# Altium PCB V1.PcbDoc
Units mm, origin at the board's own origin, x right, y up, seen from the top; angles counter-clockwise.
Board outline 48 x 33 mm, 4 copper layers (Top Layer, GND, PWR, Bottom Layer), stack 0.778 mm thick; 46 components, 45 nets, 226 pads, 36 vias.
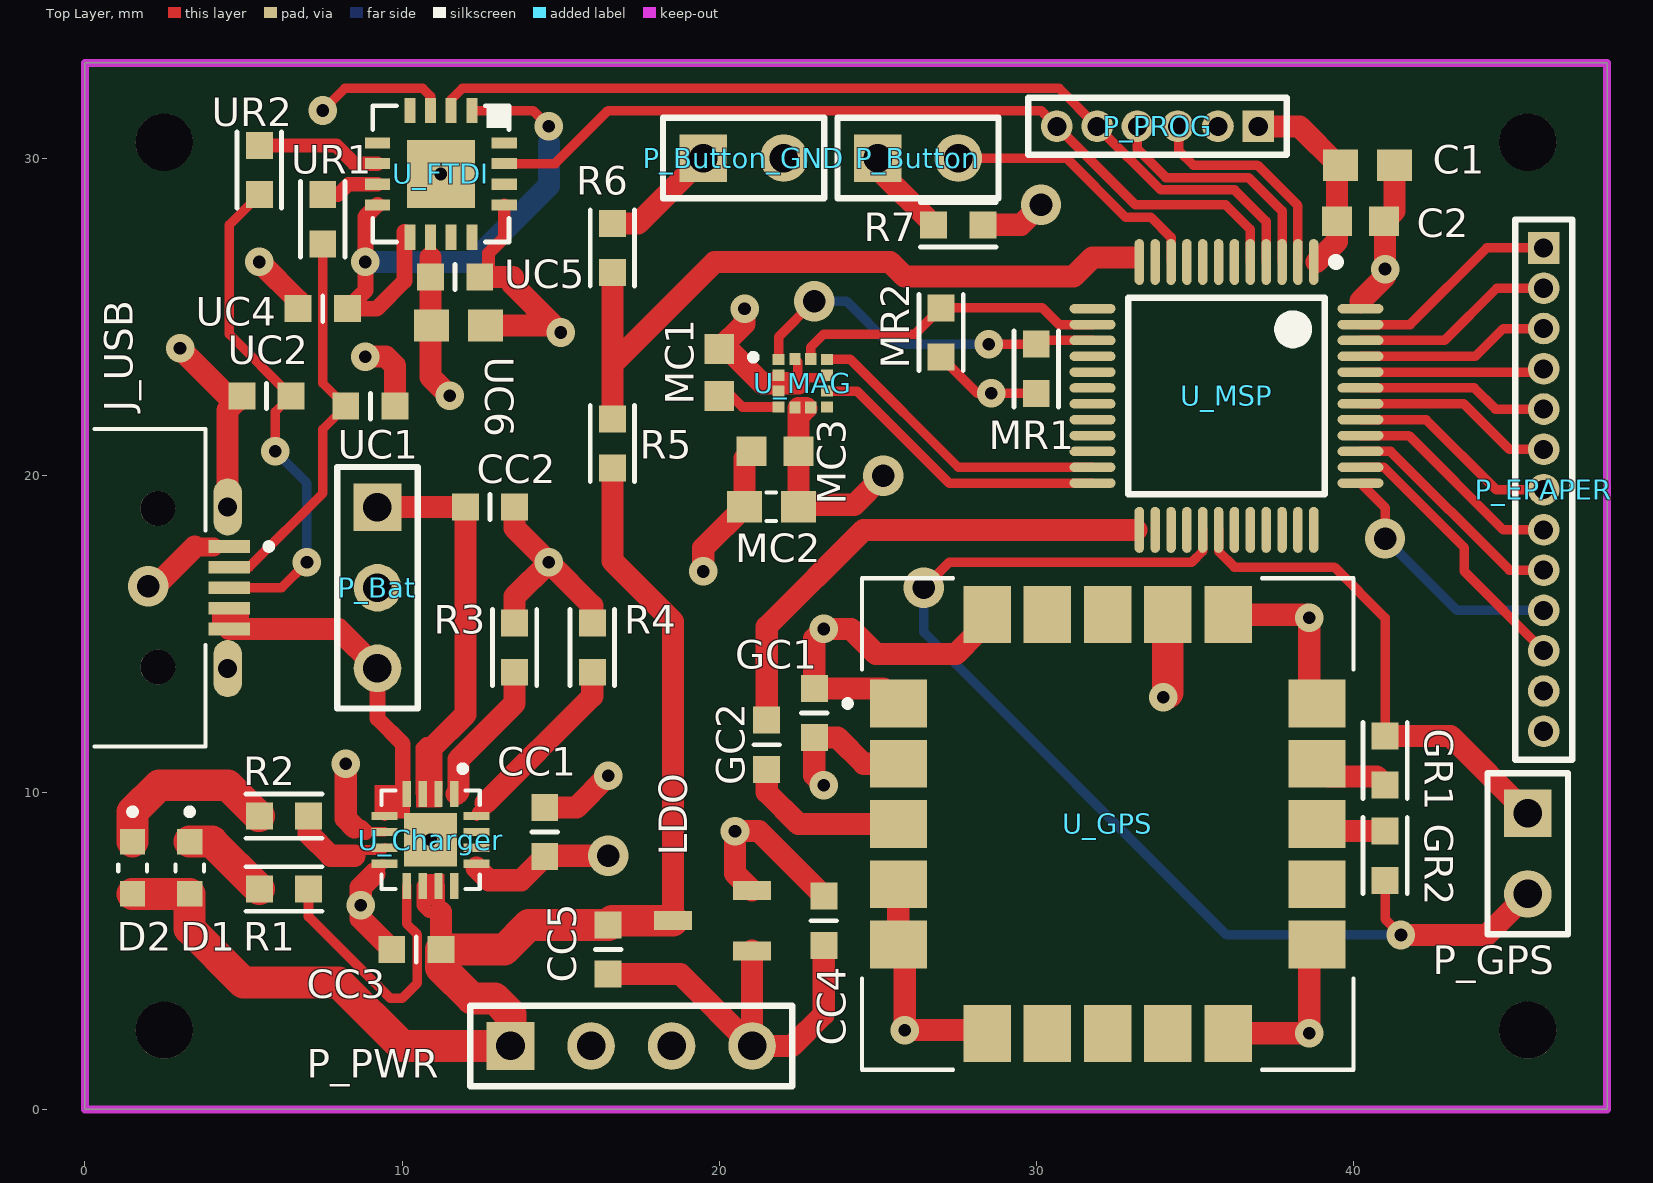
[diagram p0: Top Layer view]
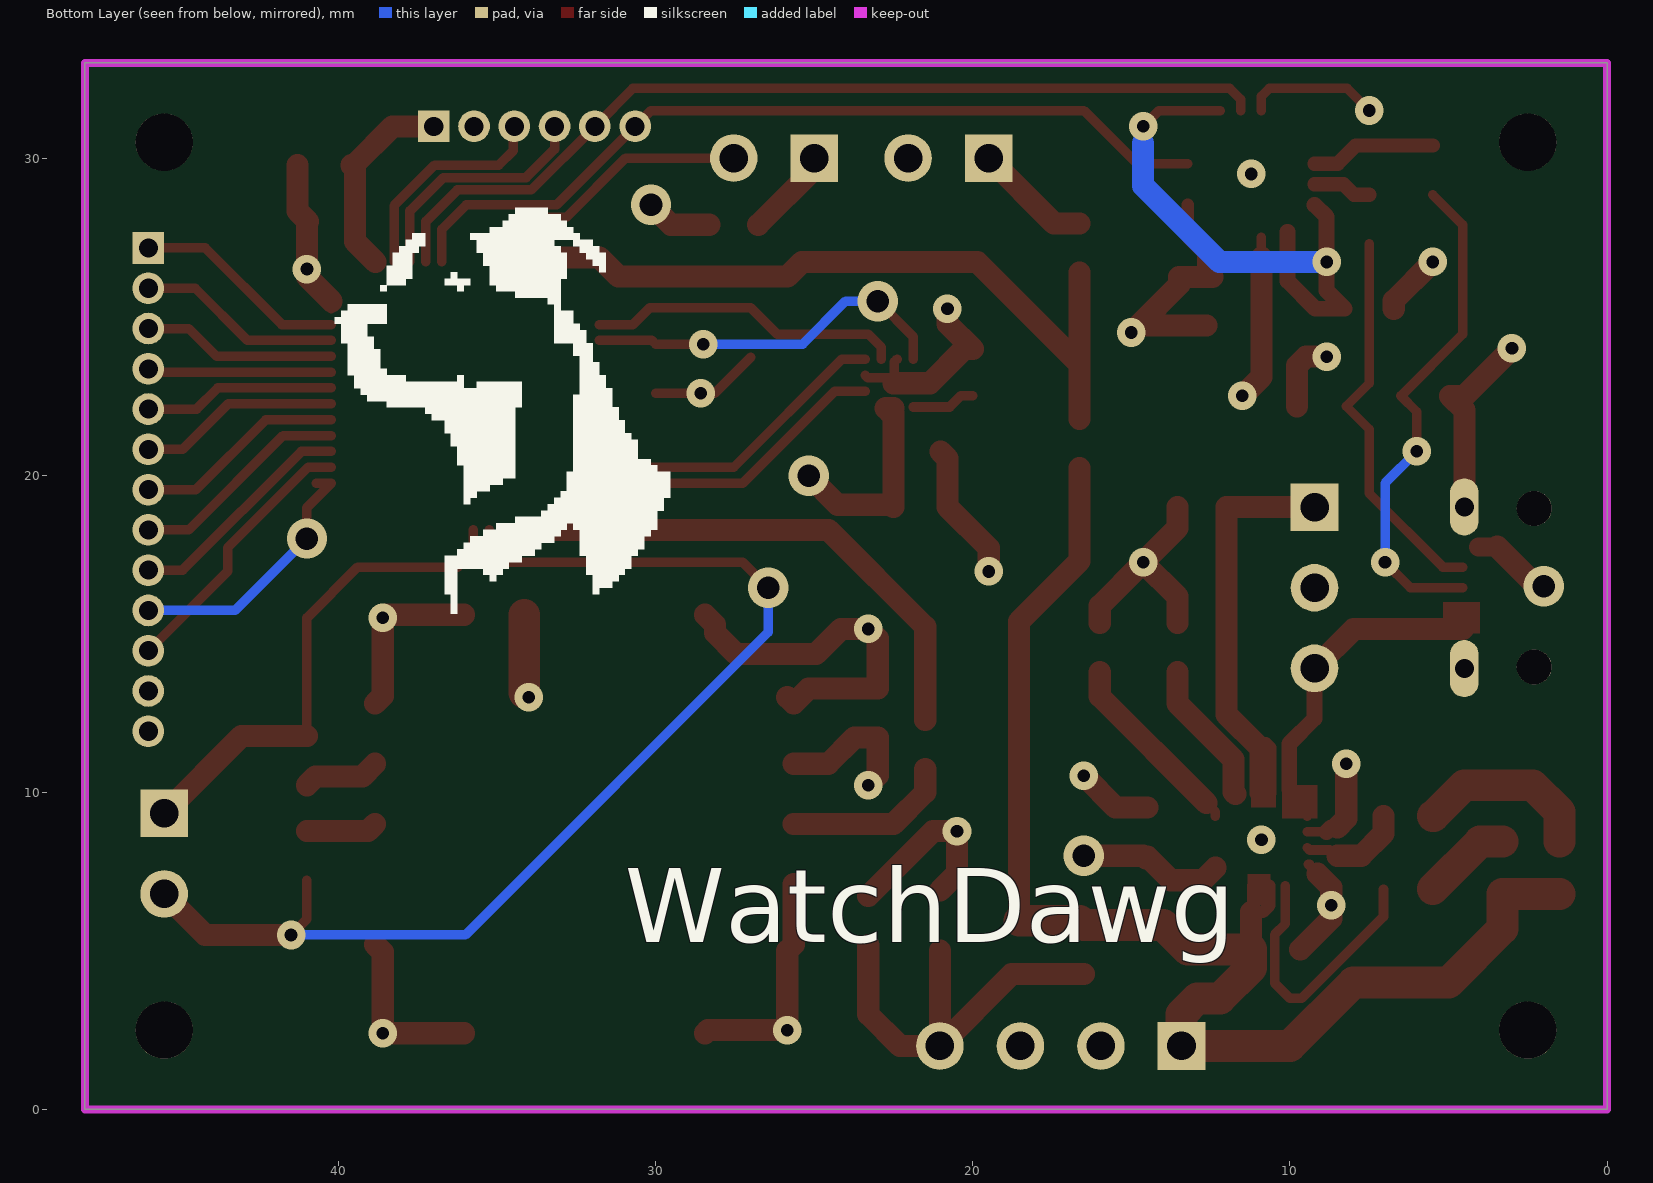
[diagram p1: Bottom Layer view, seen from below]
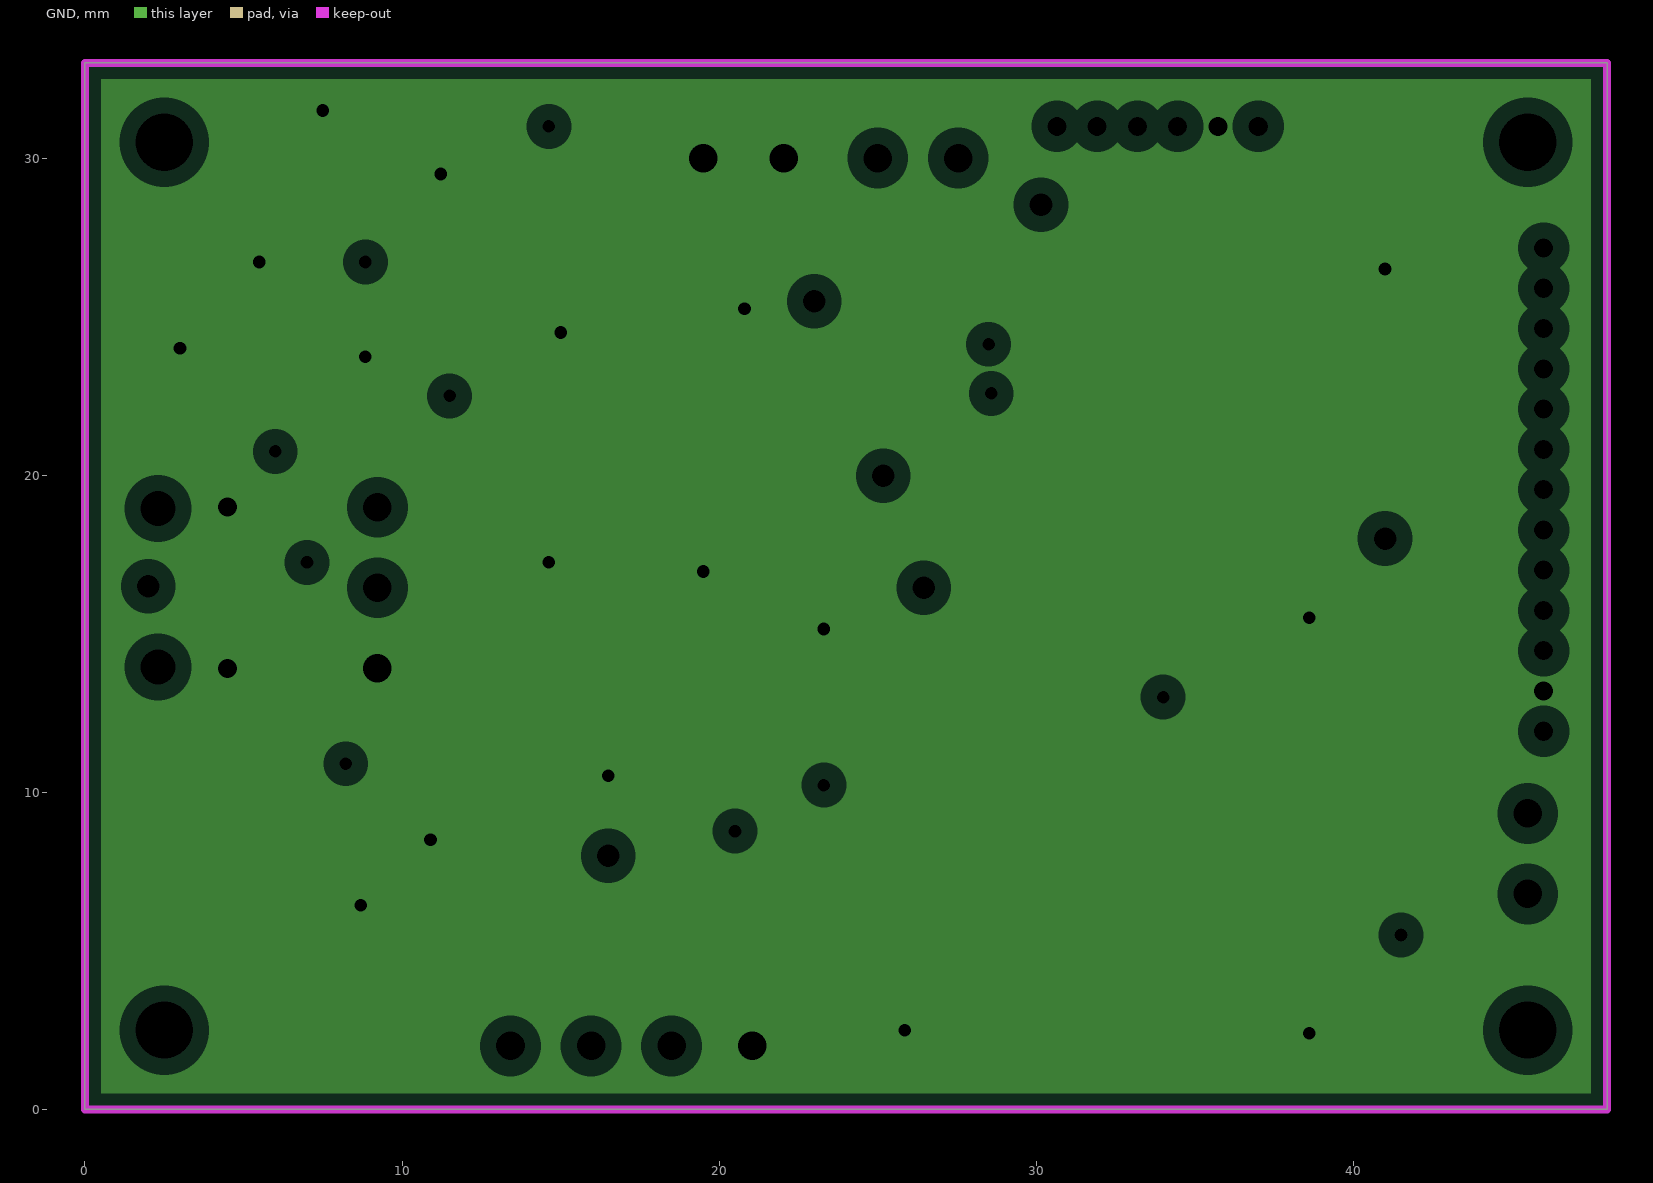
[diagram p2: GND, clearances drawn from the general rule]
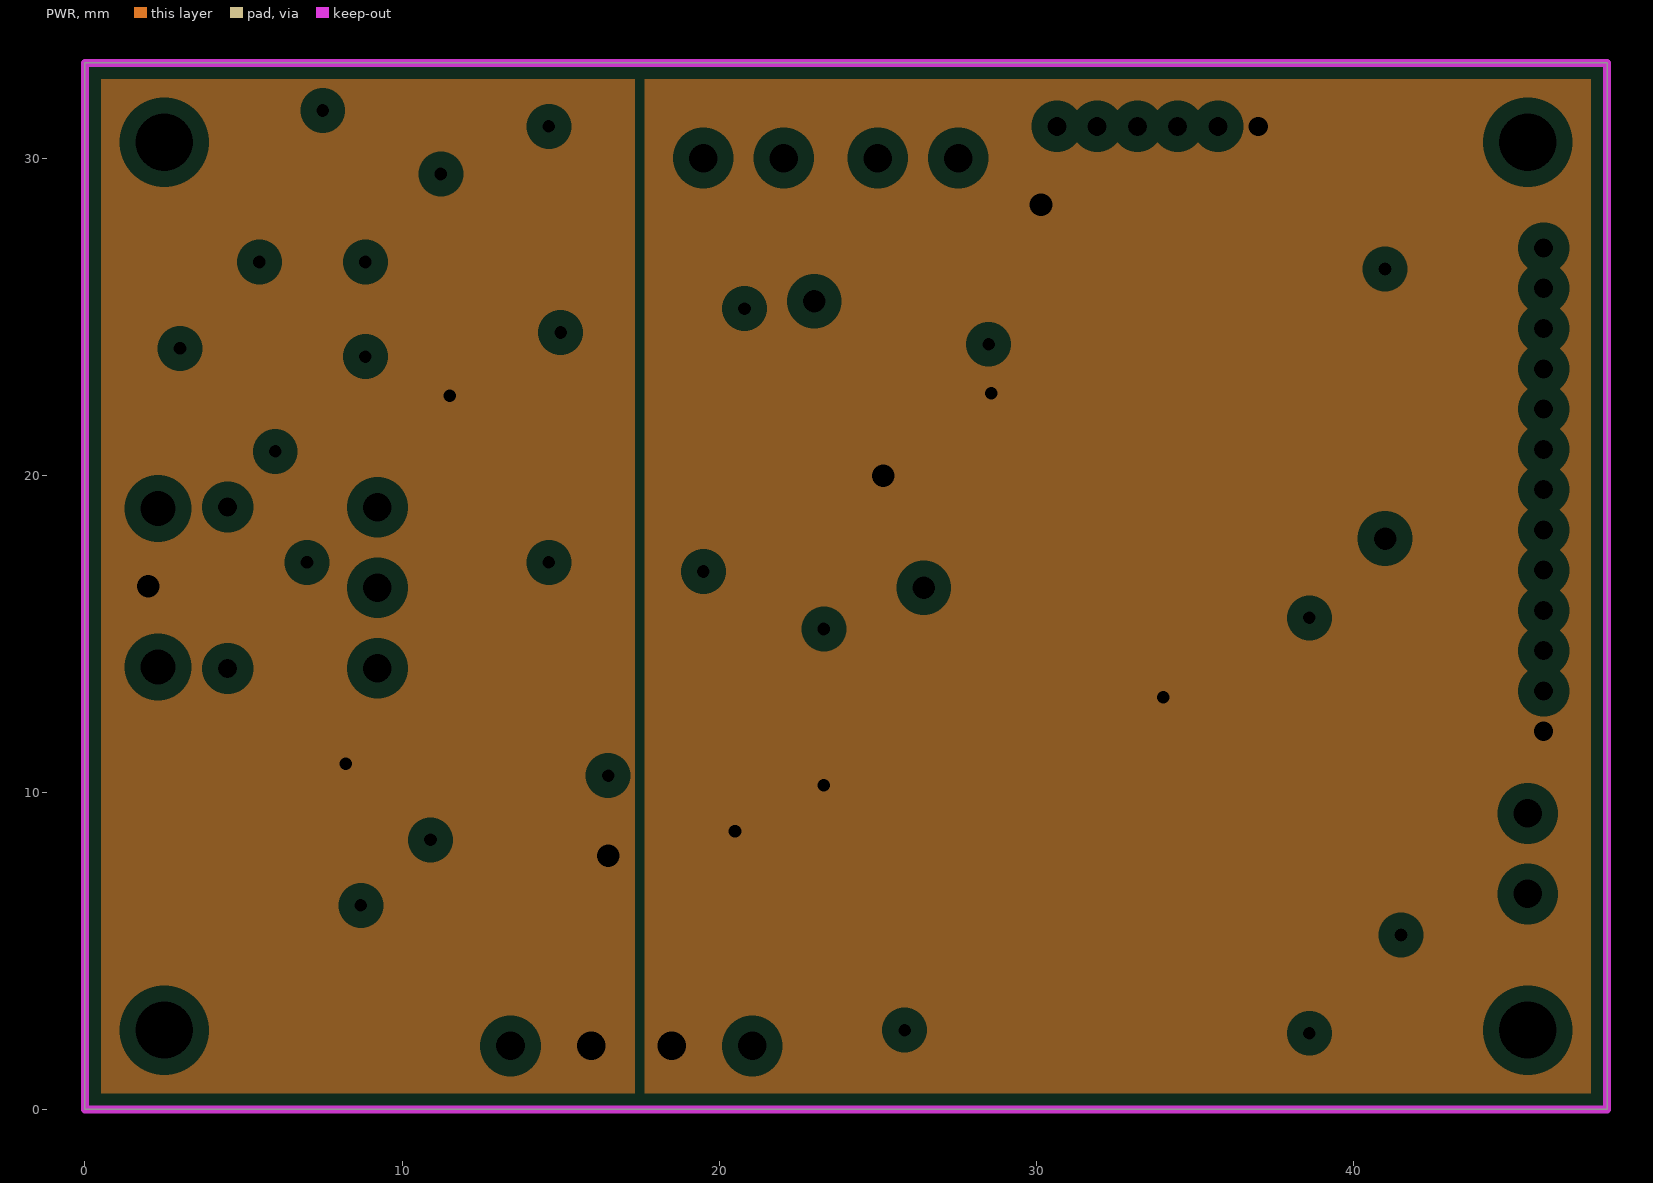
[diagram p3: PWR, clearances drawn from the general rule]
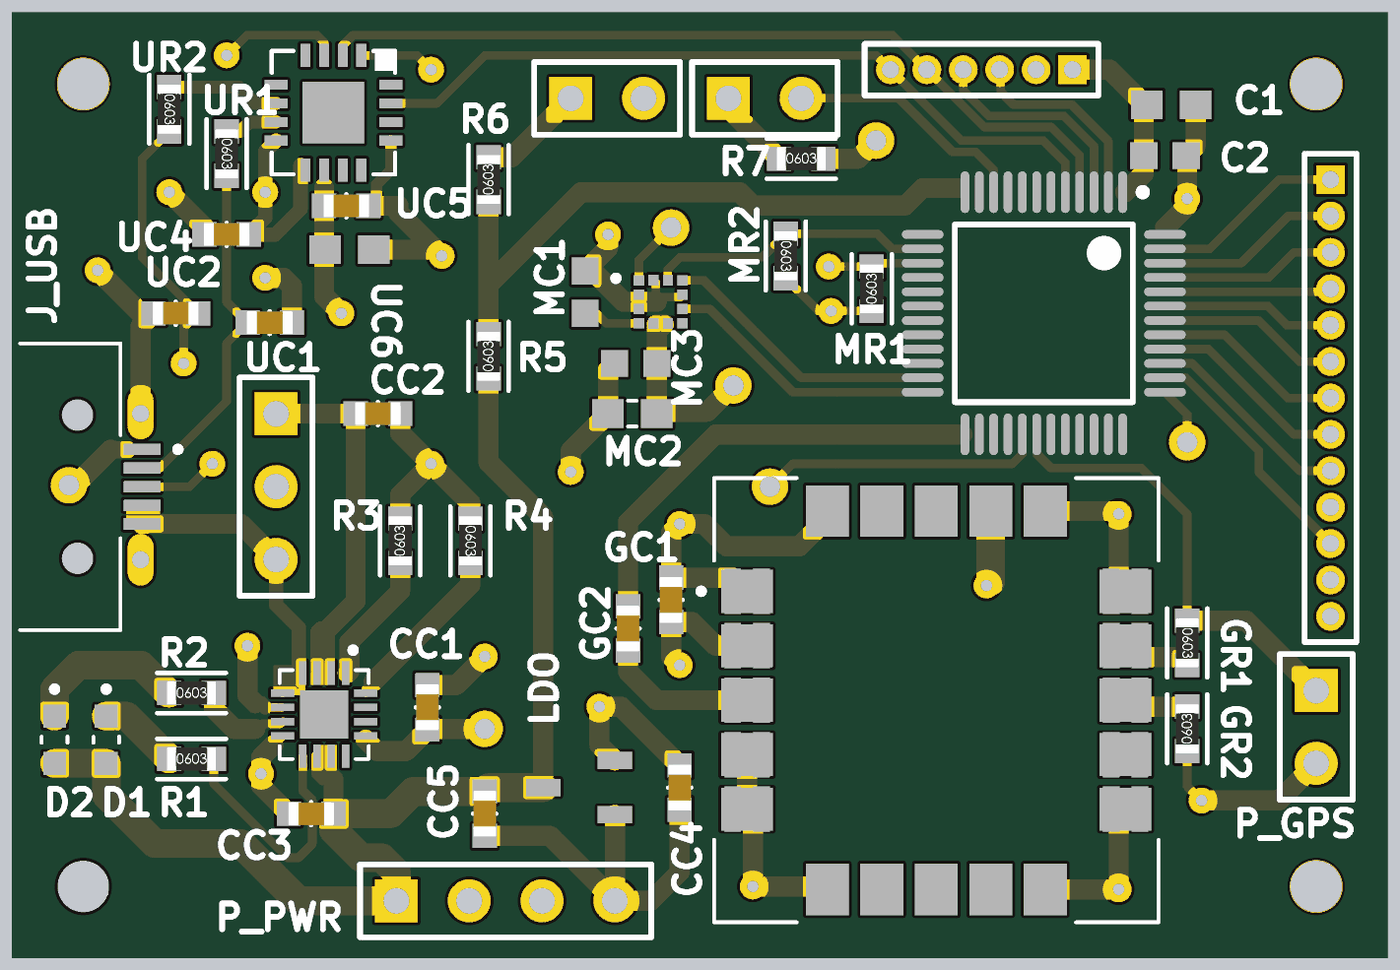
[diagram p4: 3D render of the assembled board from above, using the file's embedded part models]

## Layer stack, top to bottom
Top Solder: solder mask 0.0102, Solder Resist, Dk 3.5
Top Layer: signal copper 0.0356
Dielectric 1: core 0.254, FR-4, Dk 4.2
GND: plane copper 0.036, net GND
Dielectric 3: prepreg 0.127, Dk 4.2
PWR: plane copper 0.036, net (Multiple Nets)
Dielectric 2: core 0.254, Dk 4.2
Bottom Layer: signal copper 0.0356
Bottom Solder: solder mask 0.0102, Solder Resist, Dk 3.5

## Board outline
0,0 0,33 48,33 48,0

## Design rules (kind name [scope] priority, off if disabled: settings)
Clearance [All] p1: gap=0.09 ignorepadtopadclearanceinfootprint=FALSE except(0: Arc-Hole Track-Hole SMDPad-Hole THPad-Hole Via-Hole Fill-Hole Poly-Hole Region-Hole Text-Hole; 0.127: Arc-Via Track-Via SMDPad-Via THPad-Via Via-Via)
ComponentClearance [All] p1: gap=0.05 collisioncheckmode=3 verticalgap=0.05 showdistances=FALSE
MinimumSolderMaskSliver [All] p1: minsoldermaskwidth=0.035
PlaneClearance [All] p1: clearance=0.508
PlaneConnect [All] p1: planeconnectstyle=Relief reliefexpansion=0.508 reliefentries=4 reliefconductorwidth=0.254 reliefairgap=0.254
PolygonConnect [All] p1: connectstyle=Relief reliefconductorwidth=0.254 reliefentries=4 polygonreliefangle="90 Angle" airgapwidth=0.254
RoutingVias [All] p1: holewidth=0.711 width=1.27 viastyle="Through Hole" minholewidth=0.711 minwidth=1.27 maxholewidth=0.711 maxwidth=1.27
SilkToSilkClearance [All] p1: silktosilkclearance=0.1
SilkToSolderMaskClearance [IsPad] p1: minsilkscreentomaskgap=0.1 clearancetoexposedcopper=TRUE
SolderMaskExpansion [All] p1: expansion=0.102
Width [All] p1: maxlimit=1 minlimit=0.3 preferedwidth=0.7 minimp=50.000000 maximp=50.000000 favimp=50.000000
24 further rules are at their usual default settings.

## Classes and differential pairs
component class USB-FTDI: J_USB U_FTDI UC1 UC2 UC4 UC5 UC6 UR1 UR2
component class MSP430: C1 C2 P_Button P_Button_GND P_PROG R7 U_MSP
component class Magnetometer: MC1 MC2 MC3 MR1 MR2 U_MAG
component class GPS: GC1 GC2 GR1 GR2 P_GPS U_GPS
component class EPaper: P_EPAPER
component class Power: CC1 CC2 CC3 CC4 CC5 D1 D2 LDO P_Bat P_PWR R2 R3 R4 R5 R6 R7 U_Charger

## Components (designator, comment, footprint, x,y, rotation, side; value= is the part's Value field where it differs from the comment)
C1 "10uF" 0603-POLAR 40.445,29.776 r180 top
C2 "0.1uF" *CAPC1608X90N 40.225,28 r0 top
CC1 "1µF" SMD-0603C 14.5,8.75 r0 top
CC2 "1µF" SMD-0603C 12.775,19 r270 top
CC3 "4.7µF" SMD-0603C 10.45,5.04 r270 top
CC4 "1µF" SMD-0603C 23.3,5.95 r0 top
CC5 "1µF" SMD-0603C 16.5,5.04 r180 top
D1 "SML-D12U1WT86" *LED_SML-D12Y1WT86_SML-D12U1WT86(Primary) 3.3,7.62 r270 top
D2 "SML-D12U1WT86" *LED_SML-D12Y1WT86_SML-D12U1WT86(Primary) 1.5,7.62 r270 top
GC1 "1µF" SMD-0603C 23,12.5 r180 top
GC2 "1µF" SMD-0603C 21.5,11.5 r180 top
GR1 "470" SMD-0603-RES 41,11 r180 top
GR2 "470" SMD-0603-RES 41,8 r0 top
J_USB "UJ2-MIBH-4-SMT-TR-67" *CUI_UJ2-MIBH-4-SMT-TR-67_UJ2-MIBH-4-SMT-TR-67(Primary) 0.3,16.45 r0 top locked
LDO "250mA 3.3V Ultra Low IQ LDO Reg. SOT23 DiodesZetex AP2138N-3.3TRG1, Low Noise LDO Voltage Regulator, 250 (Min)mA, 3.3 V +/-2%, 2.5 to 6.6 Vin, 3-Pin SOT-23Source:  Datasheet" SOT95P282X145-3N 19.79,5.95 r180 top
MC1 "GMK107BJ104KAHT" *CAPC1608X90N 20,23.238 r90 top
MC2 "TACL105K016XTA" *CAPC1608X90 21.65,19 r180 top
MC3 "GMK107BJ104KAHT" *CAPC1608X90N 21.762,20.75 r180 top
MR1 "10k" SMD-0603-RES 30,23.355 r0 top
MR2 "10k" SMD-0603-RES 27,24.5 r180 top
P_Bat "Header 3" HDR1X3 9.225,18.99 r270 top
P_Button "Header 2" HDR1X2 25,30 r0 top
P_Button_GND "Header 2" HDR1X2 19.5,30 r0 top
P_EPAPER "MHDR1X13" MHDR1X13 46,27.165 r270 top
P_GPS "Header 2" HDR1X2 45.5,9.335 r270 top
P_PROG "MHDR1X6" MHDR1X6 37,31 r180 top
P_PWR "Header 4" HDR1X4 13.42,2 r0 top
R1 "1.5k" SMD-0603-RES 6.275,6.95 r270 top
R2 "1.5k" SMD-0603-RES 6.275,9.25 r270 top
R3 "10k" SMD-0603-RES 13.55,14.56 r0 top
R4 "3.4k" SMD-0603-RES 16,14.56 r180 top
R5 "1M" SMD-0603-RES 16.635,21 r0 top
R6 "1M" SMD-0603-RES 16.635,27.165 r0 top
R7 "10k" SMD-0603-RES 27.54,27.895 r270 top
U_Charger "BQ24232HARGTR" *QFN50P300X300X100-17N 10.9,8.5 r270 top
U_FTDI "FT230XQ-T" *QFN16 11.225,29.5 r270 top
U_GPS "SAM-M8Q" *XCVR_SAM-M8Q 32.25,9 r0 top
U_MAG "LIS3MDLTR" *XDCR_LIS3MDLTR 22.638,22.9 r0 top
U_MSP "MSP430FR2476TPTR" PT0048A_N 36,22.5 r270 top value=Value
UC1 "47pF" SMD-0603C 9,22.175 r270 top
UC2 "47pF" SMD-0603C 5.725,22.5 r270 top
UC4 "0.10µF" SMD-0603C 7.5,25.25 r270 top
UC5 "0.10µF" SMD-0603C 11.675,26.25 r90 top
UC6 "10uF" 0603-POLAR 11.78,24.72 r180 top
UR1 "27" SMD-0603-RES 7.5,28.07 r180 top
UR2 "27" SMD-0603-RES 5.5,29.62 r180 top

## Footprints (in the part's own frame and the unit in brackets; to place one, negate y for a bottom-side part, rotate by r counter-clockwise, add the part's x,y. Pads: shape width x height; smd on the part's side, far side on the other; paste and mask are expansions set on the pad)
0603-POLAR [mm]
  rect 1.1x1 smd: +(0.85,0) -(-0.85,0)
*CAPC1608X90 [mm]
  rect 1.1x1 smd: 1(-0.85,0) 2(0.85,0)
  silkscreen extent -0.15,-0.45 0.15,0.45
*CAPC1608X90N [mm]
  rect 0.95x0.93 smd: 1(-0.738,0) 2(0.738,0)
*CUI_UJ2-MIBH-4-SMT-TR-67_UJ2-MIBH-4-SMT-TR-67(Primary) [mm]
  rect 1.3x0.4 smd: 1(4.25,1.3) 2(4.25,0.65) 3(4.25,0) 4(4.25,-0.65) 5(4.25,-1.3)
  round 1.1 hole 1.1 unplated: None(2,-2.5) None(2,2.5)
  oval 0.9x1.8 hole 0.6: S1(4.2,2.55) S2(4.2,-2.55)
  silkscreen extent 0,-5 5.6,5
*LED_SML-D12Y1WT86_SML-D12U1WT86(Primary) [mm]
  rect 0.8x0.8 smd: A(0.825,0) C(-0.825,0)
  silkscreen extent -1.86,-0.45 0.11,0.45
*QFN16 [mm]
  rect 0.8x0.35 smd: 1(-2,0.975) 2(-2,0.325) 3(-2,-0.325) 4(-2,-0.975) 9(2,-0.975) 10(2,-0.325) 11(2,0.325) 12(2,0.975)
  rect 0.35x0.8 smd: 5(-0.975,-2) 6(-0.325,-2) 7(0.325,-2) 8(0.975,-2) 13(0.975,2) 14(0.325,2) 15(-0.325,2) 16(-0.975,2)
  rect 2.15x2.15 smd: 17(0,0)
  silkscreen extent -2.15,-2.15 2.15,2.15
*QFN50P300X300X100-17N [mm]
  rect 0.82x0.26 smd: 1(-1.45,0.75) 2(-1.45,0.25) 3(-1.45,-0.25) 4(-1.45,-0.75) 9(1.45,-0.75) 10(1.45,-0.25) 11(1.45,0.25) 12(1.45,0.75)
  rect 0.26x0.82 smd: 5(-0.75,-1.45) 6(-0.25,-1.45) 7(0.25,-1.45) 8(0.75,-1.45) 13(0.75,1.45) 14(0.25,1.45) 15(-0.25,1.45) 16(-0.75,1.45)
  rect 1.68x1.68 smd: 17(0,0)
  silkscreen extent -2.34,-1.55 1.55,1.55
*XCVR_SAM-M8Q [mm]
  rect 1.8x1.5 smd: 1(-6.6,3.8) 2(-6.6,1.9) 3(-6.6,0) 4(-6.6,-1.9) 5(-6.6,-3.8) 11(6.6,-3.8) 12(6.6,-1.9) 13(6.6,0) 14(6.6,1.9) 15(6.6,3.8)
  rect 1.5x1.8 smd: 6(-3.8,-6.6) 7(-1.9,-6.6) 8(0,-6.6) 9(1.9,-6.6) 10(3.8,-6.6) 16(3.8,6.6) 17(1.9,6.6) 18(0,6.6) 19(-1.9,6.6) 20(-3.8,6.6)
  silkscreen extent -8.3,-7.75 7.75,7.75
*XDCR_LIS3MDLTR [mm]
  rect 0.375x0.35 smd: 1(-0.763,0.75) 2(-0.763,0.25) 3(-0.763,-0.25) 4(-0.763,-0.75) 7(0.763,-0.75) 8(0.763,-0.25) 9(0.763,0.25) 10(0.763,0.75)
  rect 0.35x0.375 smd: 5(-0.25,-0.763) 6(0.25,-0.763) 11(0.25,0.763) 12(-0.25,0.763)
  silkscreen extent -1.66,0.72 -1.46,0.92
HDR1X2 [mm] "Connector; Header; 2 Position"
  rect 1.5x1.5 hole 0.9: 1(0,0)
  round 1.5 hole 0.9: 2(2.54,0)
  silkscreen extent -1.27,-1.27 3.81,1.27
HDR1X3 [mm] "Connector; Header; 3 Position"
  rect 1.5x1.5 hole 0.9: 1(0,0)
  round 1.5 hole 0.9: 2(2.54,0) 3(5.08,0)
  silkscreen extent -1.27,-1.27 6.35,1.27
HDR1X4 [mm] "Connector; Header; 4 Position"
  rect 1.5x1.5 hole 0.9: 1(0,0)
  round 1.5 hole 0.9: 2(2.54,0) 3(5.08,0) 4(7.62,0)
  silkscreen extent -1.27,-1.27 8.89,1.27
MHDR1X6 [mm] "Connector; Header; 6 Position"
  rect 1x1 hole 0.6: 1(0,0)
  round 1 hole 0.6: 2(1.27,0) 3(2.54,0) 4(3.81,0) 5(5.08,0) 6(6.35,0)
  silkscreen extent -0.9,-0.9 7.25,0.9
MHDR1X13 [mm] "Connector; Header; 13 Position"
  rect 1x1 hole 0.6: 1(0,0)
  round 1 hole 0.6: 2(1.27,0) 3(2.54,0) 4(3.81,0) 5(5.08,0) 6(6.35,0) 7(7.62,0) 8(8.89,0) 9(10.16,0) 10(11.43,0) 11(12.7,0) 12(13.97,0) 13(15.24,0)
  silkscreen extent -0.9,-0.9 16.14,0.9
PT0048A_N [mm]
  oval 1.45x0.3 smd paste+0 mask+0: 1(-4.225,2.75) 2(-4.225,2.25) 3(-4.225,1.75) 4(-4.225,1.25) 5(-4.225,0.75) 6(-4.225,0.25) 7(-4.225,-0.25) 8(-4.225,-0.75) 9(-4.225,-1.25) 10(-4.225,-1.75) 11(-4.225,-2.25) 12(-4.225,-2.75) 25(4.225,-2.75) 26(4.225,-2.25) 27(4.225,-1.75) 28(4.225,-1.25) 29(4.225,-0.75) 30(4.225,-0.25) 31(4.225,0.25) 32(4.225,0.75) 33(4.225,1.25) 34(4.225,1.75) 35(4.225,2.25) 36(4.225,2.75)
  oval 0.3x1.45 smd paste+0 mask+0: 13(-2.75,-4.225) 14(-2.25,-4.225) 15(-1.75,-4.225) 16(-1.25,-4.225) 17(-0.75,-4.225) 18(-0.25,-4.225) 19(0.25,-4.225) 20(0.75,-4.225) 21(1.25,-4.225) 22(1.75,-4.225) 23(2.25,-4.225) 24(2.75,-4.225) 37(2.75,4.225) 38(2.25,4.225) 39(1.75,4.225) 40(1.25,4.225) 41(0.75,4.225) 42(0.25,4.225) 43(-0.25,4.225) 44(-0.75,4.225) 45(-1.25,4.225) 46(-1.75,4.225) 47(-2.25,4.225) 48(-2.75,4.225)
  silkscreen extent -4.35,-3.1 3.1,3.58, body extent 0,0 0.25,0.25, height 0.25
SMD-0603-RES [mm]
  rect 0.85x0.85 smd: 1(0,0.775) 2(0,-0.775)
  silkscreen extent -0.7,-1.2 0.7,1.2, body extent -0.4,-0.85 0.4,0.85, height 0.56
SMD-0603C [mm]
  rect 0.85x0.85 smd: 1(0,0.775) 2(0,-0.775)
  silkscreen extent -0.4,0 0.4,0, body extent -0.4,-0.8 0.4,0.8, height 0.9
SOT95P282X145-3N [mm]
  rect 1.2x0.6 smd: 1(-1.25,0.95) 2(-1.25,-0.95) 3(1.25,0)

## Part data
C1 UC6: library part 10UF-POLAR-0603-6.3V-20%(TANT), Package=0603-POLAR, DeviceName=-0603-6.3V-20%(TANT), DeviceSetName=10UF-POLAR, GateName_1=G$1, LibraryName=SparkFun-Capacitors, PROD_ID=CAP-13210, SymbolName_1=CAP_POL
C2: library part GMK107BJ104KAHT, "CAP , MLCC , 0603, 35V , X5R, 0.1uF10% , T&R", Package="1608 Taiyo Yuden", Digi-Key_Part_Number=587-3357-1-ND, Digi-Key_Purchase_URL=https://www.digikey.com/product-detail/en/taiyo-yuden/GMK107BJ104KAHT/587-3357-1-ND/4157244?utm_source=snapeda&utm_medium=aggregator&utm_campaign=symbol, MF="Taiyo Yuden", MP=GMK107BJ104KAHT, SnapEDA_Link=https://www.snapeda.com/parts/GMK107BJ104KAHT/Taiyo%20Yuden/view-part/?ref=snap
CC1 CC2 CC4 CC5 GC1 GC2: library part GRM188R61A105KA61D, "CAP CER 1UF 10V X5R 0603", Digi-Key Part Number=490-1543-1-ND, Manufacturer="Murata Electronics North America", Operating Temperature="-55°C ~ 85°C", Package / Case="0603 (1608 Metric)", Ratings=-, Temperature Coefficient=X5R, Tolerance=±10%, Voltage=10V, @ qty=0, Applications="General Purpose", Datasheets=http://www.murata.com/~/media/webrenewal/support/library/catalog/products/capacitor/mlcc/c02e.pdf, Factory Stock=0, Features=-, Height - Seated (Max)=-, Image=//media.digikey.com/Renders/Murata%20Renders/ZRB-SERIES-0402.jpg, Lead Spacing=-, Lead Style=-, Minimum Quantity=1, Mounting Type="Surface Mount, MLCC", Packaging="Cut Tape (CT)", Part Number=GRM188R61A105KA61D, Part Status=Active, Quantity Available=2638296, Series=GRM, Size / Dimension="0.063\" L x 0.031\" W (1.60mm x 0.80mm)", Thickness (Max)="0.035\" (0.90mm)", Unit Price (USD)=0.1
CC3: library part GRM185R60G475ME15D, "CAP CER 4.7UF 4V X5R 0603", Digi-Key Part Number=490-3891-1-ND, Manufacturer="Murata Electronics North America", Operating Temperature="-55°C ~ 85°C", Package / Case="0603 (1608 Metric)", Ratings=-, Temperature Coefficient=X5R, Tolerance=±20%, Voltage=4V, @ qty=0, Applications="General Purpose", Datasheets=http://www.murata.com/~/media/webrenewal/support/library/catalog/products/capacitor/mlcc/c02e.pdf, Factory Stock=0, Features=-, Height - Seated (Max)=-, Image=//media.digikey.com/Renders/Murata%20Renders/ZRB-SERIES-0402.jpg, Lead Spacing=-, Lead Style=-, Minimum Quantity=1, Mounting Type="Surface Mount, MLCC", Packaging="Cut Tape (CT)", Part Number=GRM185R60G475ME15D, Part Status=Active, Quantity Available=29936, Series=GRM, Size / Dimension="0.063\" L x 0.031\" W (1.60mm x 0.80mm)", Thickness (Max)="0.020\" (0.50mm)", Unit Price (USD)=0.25
D1 D2: "SML-D12 Series Red 0603 Diffused 63 mcd 2.2 V Surface Mount LED", Package="0603 Rohm", Digi-Key_Part_Number=SML-D12U1WT86CT-ND, Digi-Key_Purchase_URL=https://www.digikey.com/product-detail/en/rohm-semiconductor/SML-D12U1WT86/SML-D12U1WT86CT-ND/5843858?utm_source=snapeda&utm_medium=aggregator&utm_campaign=symbol, MF=Rohm, MP=SML-D12U1WT86, SnapEDA_Link=https://www.snapeda.com/parts/SML-D12U1WT86/Rohm/view-part/?ref=snap
GR1 GR2: library part ERJ-3EKF4700V, "RES SMD 470 OHM 1% 1/10W 0603", Digi-Key Part Number=P470HCT-ND, Manufacturer="Panasonic Electronic Components", Operating Temperature="-55°C ~ 155°C", Package / Case="0603 (1608 Metric)", Power (Watts)="0.1W, 1/10W", Supplier Device Package=0603, Temperature Coefficient=±100ppm/°C, Tolerance=±1%, @ qty=1500, Composition="Thick Film", Datasheets=http://industrial.panasonic.com/www-cgi/jvcr13pz.cgi?E+PZ+3+AOA0002+ERJ3EKF4700V+7+WW, Factory Stock=0, Failure Rate=-, Features="Automotive AEC-Q200", Height - Seated (Max)="0.022\" (0.55mm)", Image=//media.digikey.com/Photos/Panasonic%20Photos/MFG_ERJ-P6W%20Series.jpg, Minimum Quantity=1, Number of Terminations=2, Packaging="Cut Tape (CT)", Part Number=ERJ-3EKF4700V, Part Status=Active, Quantity Available=553629, Series=ERJ, Size / Dimension="0.063\" L x 0.031\" W (1.60mm x 0.80mm)", Unit Price (USD)=0.00379
J_USB: "Micro B, USB 2.0, 1.8 A, Right Angle, Surface Mount _SMT_, Waterproof, USB Receptacle", Package=None, CUI_purchase_URL=https://www.cuidevices.com/product/interconnect/connectors/usb-connectors/uj2-mibh-4-smt-tr-67?utm_source=snapeda.com&utm_medium=referral&utm_campaign=snapedaBOM, Digi-Key_Part_Number=102-4970-1-ND, Digi-Key_Purchase_URL=https://www.digikey.com/product-detail/en/cui-devices/UJ2-MIBH-4-SMT-TR-67/102-4970-1-ND/9564435?utm_source=snapeda&utm_medium=aggregator&utm_campaign=symbol, MF="CUI Devices", MP=UJ2-MIBH-4-SMT-TR-67, SnapEDA_Link=https://www.snapeda.com/parts/UJ2-MIBH-4-SMT-TR-67/CUI%20Devices/view-part/?ref=snap
LDO: library part AP2138N-3.3TRG1, Manufacturer_Name="Diodes Inc.", Package=SOT95P282X145-3N, Allied_Number=70551004, Allied_Price-Stock=https://www.alliedelec.com/diodesinc-ap2138n-3-3trg1/70551004/, DeviceSetName=AP2138N-3.3TRG1, GateName_1=G$1, Height=1.45mm, LibraryName=AP2138N-3.3TRG1, Manufacturer_Part_Number=AP2138N-3.3TRG1, Mouser_Part_Number=621-AP2138N-3.3TRG1, Mouser_Price-Stock=https://www.mouser.com/Search/Refine.aspx?Keyword=621-AP2138N-3.3TRG1, RS_Part_Number=9210398P, RS_Price-Stock=http://uk.rs-online.com/web/p/products/9210398P, SymbolName_1=AP2138N-3.3TRG1
MC1 MC3: "CAP , MLCC , 0603, 35V , X5R, 0.1uF10% , T&R", Package="1608 Taiyo Yuden", Digi-Key_Part_Number=587-3357-1-ND, Digi-Key_Purchase_URL=https://www.digikey.com/product-detail/en/taiyo-yuden/GMK107BJ104KAHT/587-3357-1-ND/4157244?utm_source=snapeda&utm_medium=aggregator&utm_campaign=symbol, MF="Taiyo Yuden", MP=GMK107BJ104KAHT, SnapEDA_Link=https://www.snapeda.com/parts/GMK107BJ104KAHT/Taiyo%20Yuden/view-part/?ref=snap
MC2: "Cap Tant Solid 1uF 16V L CASE 10% _1.6 X 0.85 X 0.85mm_ SMD 1608-10 7.5 Ohm 125°C Plastic T/R", Package="0603 AVX", Digi-Key_Part_Number=478-4184-1-ND, Digi-Key_Purchase_URL=https://www.digikey.com/product-detail/en/avx-corporation/TACL105K016XTA/478-4184-1-ND/1212747?utm_source=snapeda&utm_medium=aggregator&utm_campaign=symbol, MF=AVX, MP=TACL105K016XTA, SnapEDA_Link=https://www.snapeda.com/parts/TACL105K016XTA/AVX%20/%20Kyocera/view-part/?ref=snap
MR1 MR2 R3: library part ERJ-PA3J103V, "RES SMD 10K OHM 5% 1/4W 0603", Digi-Key Part Number=P10KBZCT-ND, Manufacturer="Panasonic Electronic Components", Operating Temperature="-55°C ~ 155°C", Package / Case="0603 (1608 Metric)", Power (Watts)="0.25W, 1/4W", Supplier Device Package=0603, Temperature Coefficient=±200ppm/°C, Tolerance=±5%, @ qty=1500, Composition="Thick Film", Datasheets=https://industrial.panasonic.com/cdbs/www-data/pdf/RDA0000/AOA0000C243.pdf, Factory Stock=0, Failure Rate=-, Features="Automotive AEC-Q200, Pulse Withstanding", Height - Seated (Max)="0.022\" (0.55mm)", Image=//media.digikey.com/Photos/Panasonic%20Photos/MFG_ERJ-P6W%20Series.jpg, Minimum Quantity=1, Number of Terminations=2, Packaging="Cut Tape (CT)", Part Number=ERJ-PA3J103V, Part Status=Active, Quantity Available=26345, Series=ERJ, Size / Dimension="0.063\" L x 0.031\" W (1.60mm x 0.80mm)", Unit Price (USD)=0.01646
P_Bat: "Header, 3-Pin", LatestRevisionDate=17-Jul-2002, LatestRevisionNote="Re-released for DXP Platform.", Publisher="Altium Limited"
P_Button P_Button_GND P_GPS: "Header, 2-Pin", LatestRevisionDate=17-Jul-2002, LatestRevisionNote="Re-released for DXP Platform.", Publisher="Altium Limited"
P_EPAPER: "Header, 13-Pin", LatestRevisionDate=17-Jul-2002, LatestRevisionNote="Re-released for DXP Platform.", Publisher="Altium Limited"
P_PROG: "Header, 6-Pin", LatestRevisionDate=17-Jul-2002, LatestRevisionNote="Re-released for DXP Platform.", Publisher="Altium Limited"
P_PWR: "Header, 4-Pin", LatestRevisionDate=17-Jul-2002, LatestRevisionNote="Re-released for DXP Platform.", Publisher="Altium Limited"
R1 R2: library part ERJ-3EKF1501V, "RES SMD 1.5K OHM 1% 1/10W 0603", Digi-Key Part Number=P1.50KHCT-ND, Manufacturer="Panasonic Electronic Components", Operating Temperature="-55°C ~ 155°C", Package / Case="0603 (1608 Metric)", Power (Watts)="0.1W, 1/10W", Supplier Device Package=0603, Temperature Coefficient=±100ppm/°C, Tolerance=±1%, @ qty=1500, Composition="Thick Film", Datasheets=http://industrial.panasonic.com/www-cgi/jvcr13pz.cgi?E+PZ+3+AOA0002+ERJ3EKF1501V+7+WW, Factory Stock=0, Failure Rate=-, Features="Automotive AEC-Q200", Height - Seated (Max)="0.022\" (0.55mm)", Image=//media.digikey.com/Photos/Panasonic%20Photos/MFG_ERJ-P6W%20Series.jpg, Minimum Quantity=1, Number of Terminations=2, Packaging="Cut Tape (CT)", Part Number=ERJ-3EKF1501V, Part Status=Active, Quantity Available=417970, Series=ERJ, Size / Dimension="0.063\" L x 0.031\" W (1.60mm x 0.80mm)", Unit Price (USD)=0.00379
R4: library part ERJ-3EKF3401V, "RES SMD 3.4K OHM 1% 1/10W 0603", Digi-Key Part Number=P3.40KHCT-ND, Manufacturer="Panasonic Electronic Components", Operating Temperature="-55°C ~ 155°C", Package / Case="0603 (1608 Metric)", Power (Watts)="0.1W, 1/10W", Supplier Device Package=0603, Temperature Coefficient=±100ppm/°C, Tolerance=±1%, @ qty=1500, Composition="Thick Film", Datasheets=http://industrial.panasonic.com/www-cgi/jvcr13pz.cgi?E+PZ+3+AOA0002+ERJ3EKF3401V+7+WW, Factory Stock=0, Failure Rate=-, Features="Automotive AEC-Q200", Height - Seated (Max)="0.022\" (0.55mm)", Image=//media.digikey.com/Photos/Panasonic%20Photos/MFG_ERJ-P6W%20Series.jpg, Minimum Quantity=1, Number of Terminations=2, Packaging="Cut Tape (CT)", Part Number=ERJ-3EKF3401V, Part Status=Active, Quantity Available=58954, Series=ERJ, Size / Dimension="0.063\" L x 0.031\" W (1.60mm x 0.80mm)", Unit Price (USD)=0.00379
R5 R6: library part ERJ-3EKF1004V, "RES SMD 1M OHM 1% 1/10W 0603", Digi-Key Part Number=P1.00MHCT-ND, Manufacturer="Panasonic Electronic Components", Operating Temperature="-55°C ~ 155°C", Package / Case="0603 (1608 Metric)", Power (Watts)="0.1W, 1/10W", Supplier Device Package=0603, Temperature Coefficient=±100ppm/°C, Tolerance=±1%, @ qty=1500, Composition="Thick Film", Datasheets=http://industrial.panasonic.com/www-cgi/jvcr13pz.cgi?E+PZ+3+AOA0002+ERJ3EKF1004V+7+WW, Factory Stock=0, Failure Rate=-, Features="Automotive AEC-Q200", Height - Seated (Max)="0.022\" (0.55mm)", Image=//media.digikey.com/Photos/Panasonic%20Photos/MFG_ERJ-P6W%20Series.jpg, Minimum Quantity=1, Number of Terminations=2, Packaging="Cut Tape (CT)", Part Number=ERJ-3EKF1004V, Part Status=Active, Quantity Available=1632074, Series=ERJ, Size / Dimension="0.063\" L x 0.031\" W (1.60mm x 0.80mm)", Unit Price (USD)=0.00379
R7: library part ERJ-PA3F1002V, "RES SMD 10K OHM 1% 1/4W 0603", Digi-Key Part Number=P10KBYCT-ND, Manufacturer="Panasonic Electronic Components", Operating Temperature="-55°C ~ 155°C", Package / Case="0603 (1608 Metric)", Power (Watts)="0.25W, 1/4W", Supplier Device Package=0603, Temperature Coefficient=±100ppm/°C, Tolerance=±1%, @ qty=1500, Composition="Thick Film", Datasheets=https://industrial.panasonic.com/cdbs/www-data/pdf/RDA0000/AOA0000C243.pdf, Factory Stock=0, Failure Rate=-, Features="Automotive AEC-Q200, Pulse Withstanding", Height - Seated (Max)="0.022\" (0.55mm)", Image=//media.digikey.com/Photos/Panasonic%20Photos/MFG_ERJ-P6W%20Series.jpg, Minimum Quantity=1, Number of Terminations=2, Packaging="Cut Tape (CT)", Part Number=ERJ-PA3F1002V, Part Status=Active, Quantity Available=12488, Series=ERJ, Size / Dimension="0.063\" L x 0.031\" W (1.60mm x 0.80mm)", Unit Price (USD)=0.02372
U_Charger: "USB-Friendly Lithium-Ion Battery Charger and Power-Path Management IC 0.5A 10.5V OVP 16-Pin QFN T/R", Package="VFQFN-16 Texas Instruments", Digi-Key_Part_Number=296-49554-1-ND, Digi-Key_Purchase_URL=https://www.digikey.com/product-detail/en/texas-instruments/BQ24232HARGTR/296-49554-1-ND/9462552?utm_source=snapeda&utm_medium=aggregator&utm_campaign=symbol, MF="Texas Instruments", MP=BQ24232HARGTR, SnapEDA_Link=https://www.snapeda.com/parts/BQ24232HARGTR/Texas%20Instruments/view-part/?ref=snap
U_FTDI: "USB Full Speed to Basic UART IC with USB Charger Detection, QFN-16", Package="QFN-16 FTDI", Digi-Key_Part_Number=768-1153-ND, Digi-Key_Purchase_URL=https://www.digikey.com/product-detail/en/ftdi-future-technology-devices-international-ltd/FT230XQ-T/768-1153-ND/3749474?utm_source=snapeda&utm_medium=aggregator&utm_campaign=symbol, MF=FTDI,, MP=FT230XQ-T, SnapEDA_Link=https://www.snapeda.com/parts/FT230XQ-T/FTDI%2C%20Future%20Technology%20Devices%20International%20Ltd/view-part/?ref=snap
U_GPS: "u-Blox M8 Gnss Antenna Module", Package="SMD-20 U-Blox America", Digi-Key_Part_Number=672-1054-1-ND, Digi-Key_Purchase_URL=https://www.digikey.com/product-detail/en/u-blox-america-inc/SAM-M8Q-0-10/672-1054-1-ND/7393573?utm_source=snapeda&utm_medium=aggregator&utm_campaign=symbol, MF="U-Blox America", MP=SAM-M8Q, SnapEDA_Link=https://www.snapeda.com/parts/SAM-M8Q/U-Blox%20America%20Inc./view-part/?ref=snap
U_MAG: "LIS3MDL Series 3 Axis ±2/±8/±12/±16 g 3.6V High Performance Magnetometer LGA-12", Package="VFLGA-12 STMicroelectronics", Digi-Key_Part_Number=497-13892-1-ND, Digi-Key_Purchase_URL=https://www.digikey.com/product-detail/en/stmicroelectronics/LIS3MDLTR/497-13892-1-ND/4309737?utm_source=snapeda&utm_medium=aggregator&utm_campaign=symbol, MF=STMicroelectronics, MP=LIS3MDLTR, SnapEDA_Link=https://www.snapeda.com/parts/LIS3MDLTR/STMicroelectronics/view-part/?ref=snap
U_MSP: "Imported", Manufacturer="Texas Instruments", PartNumber=MSP430FR2476TPTR, RefDes=RefDes, Type=TYPE
UC1 UC2: library part GCM1885C2A470JA16D, "CAP CER 47PF 100V NP0 0603", Digi-Key Part Number=490-4944-1-ND, Manufacturer="Murata Electronics North America", Operating Temperature="-55°C ~ 125°C", Package / Case="0603 (1608 Metric)", Ratings=AEC-Q200, Temperature Coefficient="C0G, NP0", Tolerance=±5%, Voltage=100V, @ qty=0, Applications=Automotive, Datasheets=http://www.murata.com/~/media/webrenewal/support/library/catalog/products/capacitor/mlcc/c03e.ashx, Factory Stock=0, Features=-, Height - Seated (Max)=-, Image=//media.digikey.com/Renders/Murata%20Renders/0603%28GCM188%29.jpg, Lead Spacing=-, Lead Style=-, Minimum Quantity=1, Mounting Type="Surface Mount, MLCC", Packaging="Cut Tape (CT)", Part Number=GCM1885C2A470JA16D, Part Status=Active, Quantity Available=586, Series=GCM, Size / Dimension="0.063\" L x 0.031\" W (1.60mm x 0.80mm)", Thickness (Max)="0.035\" (0.90mm)", Unit Price (USD)=0.1
UC4 UC5: library part GCM188R71C104KA37D, "CAP CER 0.1UF 16V X7R 0603", Digi-Key Part Number=490-4774-1-ND, Manufacturer="Murata Electronics North America", Operating Temperature="-55°C ~ 125°C", Package / Case="0603 (1608 Metric)", Ratings=AEC-Q200, Temperature Coefficient=X7R, Tolerance=±10%, Voltage=16V, @ qty=0, Applications=Automotive, Datasheets=http://www.murata.com/~/media/webrenewal/support/library/catalog/products/capacitor/mlcc/c03e.ashx, Factory Stock=0, Features=-, Height - Seated (Max)=-, Image=//media.digikey.com/Renders/Murata%20Renders/0603%28GCM188%29.jpg, Lead Spacing=-, Lead Style=-, Minimum Quantity=1, Mounting Type="Surface Mount, MLCC", Packaging="Cut Tape (CT)", Part Number=GCM188R71C104KA37D, Part Status=Active, Quantity Available=284085, Series=GCM, Size / Dimension="0.063\" L x 0.031\" W (1.60mm x 0.80mm)", Thickness (Max)="0.035\" (0.90mm)", Unit Price (USD)=0.18
UR1 UR2: library part ERJ-3EKF27R0V, "RES SMD 27 OHM 1% 1/10W 0603", Digi-Key Part Number=P27.0HCT-ND, Manufacturer="Panasonic Electronic Components", Operating Temperature="-55°C ~ 155°C", Package / Case="0603 (1608 Metric)", Power (Watts)="0.1W, 1/10W", Supplier Device Package=0603, Temperature Coefficient=±100ppm/°C, Tolerance=±1%, @ qty=1500, Composition="Thick Film", Datasheets=http://industrial.panasonic.com/www-cgi/jvcr13pz.cgi?E+PZ+3+AOA0002+ERJ3EKF27R0V+7+WW, Factory Stock=0, Failure Rate=-, Features="Automotive AEC-Q200", Height - Seated (Max)="0.022\" (0.55mm)", Image=//media.digikey.com/Photos/Panasonic%20Photos/MFG_ERJ-P6W%20Series.jpg, Minimum Quantity=1, Number of Terminations=2, Packaging="Cut Tape (CT)", Part Number=ERJ-3EKF27R0V, Part Status=Active, Quantity Available=283006, Series=ERJ, Size / Dimension="0.063\" L x 0.031\" W (1.60mm x 0.80mm)", Unit Price (USD)=0.00379

## Free pads (board coordinates)
  round 1.8 hole 1.8 unplated: 1(2.5,2.5)
  round 1.8 hole 1.8: 2(2.5,30.5) 3(45.5,30.5) 4(45.5,2.5)

## Via types
v1: diameter 0.9, hole 0.4, Top Layer to Bottom Layer, 29 vias
v2: diameter 1.27, hole 0.711, Top Layer to Bottom Layer, 7 vias

## Nets (pads, with @x,y where several pads share a name; then routed paths per layer and width w, separated by ;. In a path a pad name is that pad's centre, name@x,y a point inside that pad or via, vN(x,y) a via of type N, cw(c..) or ccw(c..) an arc to the next point about the centre after c; other vN are vias at no path point)
3V3: C1.+ C2.1 CC4.1 GC1.1 LDO.2 MC2.1 MC3.1 MR1.2 MR2.1 P_EPAPER.13 P_PROG.1 P_PWR.3 R7.1 U_GPS.2 U_GPS.17 U_MAG.5 U_MAG.6 U_MSP.1 | length 31.6
  Top Layer w0.3: MR2.1 28.145,22.58 v1(28.58,22.58) MR1.2
  Top Layer w0.7: LDO.2 20.5,7.44 v1(20.5,8.775) 21.25,8.775 CC4.1 ; MC2.1 MC2.1@22.503,19.003 ; U_MAG.5@22.503,22.11 22.745,22.11 22.578,21.943 22.503,21.943 MC2.1@22.503,19.003 ; v1(23.3,10.225) 23,10.525 GC1.1 23.735,11.725 24.56,10.9 U_GPS.2 ; v2(25.175,19.98) 24.26,19.065 22.565,19.065 MC2.1@22.503,19.003 ; R7.1 29.52,27.895 v2(30.15,28.525) ; v1(34,13) v1@34.15,13.15 ; P_PROG.1 38.3,31 39.524,29.776 C1.+ 39.487,29.668 C2.1 39.487,27.372 U_MSP.1@38.84,26.725
  Top Layer w1: v1@34.15,13.15 U_GPS.17
+5: CC1.2 J_USB.1 P_PWR.2 U_Charger.6 U_Charger.13 U_FTDI.10 UC5.1 UC6.+ | length 15.6
  Top Layer w0.3: 8.844,8.75 U_Charger.6 ; 10.9,26.868 U_FTDI.10
  Top Layer w0.5: 8.5,8.895 8.699,8.895 8.844,8.75
  Top Layer w0.6: 3.46,17.74 J_USB.1@4.051,17.74
  Top Layer w0.7: v2(2,16.5) 2.22,16.5 3.46,17.74 ; v1(8.225,10.9) 8.225,9.17 8.5,8.895 ; 10.9,26.868 UC5.1 10.9,23.1 v1(11.5,22.5) ; 12.35,7.62 12.745,7.225 13.75,7.225 CC1.2 ; CC1.2@14.5,7.95 14.54,7.91 14.63,8 v2(16.5,8)
D+: J_USB.3 UC2.1 UR2.1 | length 16.2
  Top Layer w0.3: J_USB.3 6.2,16.45 v1(7,17.25) ; UR2.1 4.55,27.895 4.55,24.45 UC2.1 6,22 v1(6,20.75)
  Bottom Layer w0.3: v1(6,20.75) 7,19.75 v1(7,17.25)
D-: J_USB.2 UC1.2 UR1.1 | length 12.4
  Top Layer w0.3: J_USB.2 5.174,17.1 7.5,19.426 7.5,21.45 UC1.2 7.5,22.9 UR1.1
GND: C1.- C2.2 CC1.1 CC2.1 CC3.2 CC4.2 CC5.1 GC1.2 J_USB.4 J_USB.5 J_USB.S1 J_USB.S2 LDO.1 MC1.2 MC2.2 MC3.2 P_Bat.3 P_Button_GND.1 P_Button_GND.2 P_EPAPER.12 P_PROG.2 P_PWR.4 R3.1 R4.2 R6.1 U_Charger.4 U_Charger.5 U_Charger.8 U_Charger.17 U_FTDI.3 U_FTDI.13 U_FTDI.17 U_GPS.1 U_GPS.4 U_GPS.5 U_GPS.6 U_GPS.10 U_GPS.11 U_GPS.15 U_GPS.16 U_GPS.20 U_MAG.2 U_MAG.3 U_MAG.9 U_MAG.12 U_MSP.48 UC1.1 UC2.2 UC4.2 UC5.2 UC6.- | length 108.5
  Top Layer w0.3: v1(7.5,31.5) 8.2,32.2 10.65,32.2 10.9,31.95 U_FTDI.3 ; 9.131,7.429 9.131,7.431 9.43,7.73 U_Charger.8@9.38,7.73 ; U_Charger.5 9.45,9.51 10.02,10.08 ; U_MAG.12 22.473,23.578 22.473,22.928 ; 22.5,22.9 22.473,22.928 ; U_MAG.9 23.315,23.065 22.61,23.065 22.473,22.928 ; U_MSP.48 40.225,25.488
  Top Layer w0.4: UC5.2 12.725,26.525 12.725,27 13.225,27.5 U_FTDI.13
  Top Layer w0.5: P_Bat.3 9.225,12.325 10.02,11.53 10.02,10.66 ; 10.02,10.08 10.02,10.567
  Top Layer w0.7: v1(3,24) 4.5,22.5 UC2.2 4.5,22.05 J_USB.S1 ; J_USB.5 7.985,15.15 P_Bat.3 ; v1(5.5,26.725) 6.725,25.5 UC4.2 ; v1(8.844,23.738) 9.487,23.738 9.775,23.45 UC1.1 ; 9.131,7.429 8.699,6.997 v1(8.699,6.433) 8.699,6.016 CC3.2 ; UC5.2 13.49,26.25 13.49,26.01 v1@14.78,24.72 ; UC6.- v1@14.78,24.72 ; R3.1 13.55,16.17 v1(14.63,17.25) ; CC2.1 13.55,18.33 v1(14.63,17.25) ; CC1.1 15.5,9.525 v1(16.5,10.525) ; v1(15,24.5) v1@14.78,24.72 ; R4.2 16,15.88 v1(14.63,17.25) ; CC5.1 18.775,4.265 P_PWR.4 ; R6.1 17.44,27.94 P_Button_GND.1 ; v1(19.5,16.965) 19.5,17.7 MC2.2 20.8,20.526 MC3.2 ; v1(20.8,25.25) 20.8,24.776 MC1.2 20.274,23.976 21.35,22.9 22.5,22.9 ; LDO.1 P_PWR.4 ; CC4.2 23.3,3 22.3,2 P_PWR.4 ; U_GPS.4 U_GPS.5 25.85,5 v1(25.85,2.5) 28.35,2.5 U_GPS.6 ; U_GPS.1@25.85,13 U_GPS.1 25.175,13.275 GC1.2 23,14.85 v1(23.3,15.15) 24.16,15.15 24.945,14.365 27.47,14.365 28.135,15.03 28.135,15.285 U_GPS.20 ; U_GPS.10 v1(38.611,2.4) 38.611,4.961 U_GPS.11 ; U_GPS.16 38.511,15.6 v1(38.611,15.5) 38.611,13.039 U_GPS.15 ; 40.225,25.488 41,26.263 v1(41,26.5) C2.2@41,28 ; C2.2 41.295,28.332 C1.-
  other v1: 10.9,8.5 11.225,29.5
NetCC3_1: CC3.1 CC5.2 D1.A D2.A LDO.3 P_PWR.1 R5.2 U_Charger.10 U_Charger.11 | length 45
  Top Layer w0.4: U_Charger.10 10.65,6.433 10.855,6.228 11.225,6.228 11.15,6.303 U_Charger.11
  Top Layer w0.7: CC3.1 11.225,6.228 ; R5.2 16.635,17.29 18.54,15.385 LDO.3
  Top Layer w1: D2.A D1.A 3.3,5.7 5,4 8,4 10,2 P_PWR.1 13.42,3 12.92,3.5 12.2,3.5 11.225,4.475 CC3.1 13.225,5.04 14,5.815 CC5.2 16.635,5.95 LDO.3
NetD1_C: D1.C R1.2 | length 2.8
  Top Layer w1: D1.C 4.005,8.445 R1.2
NetD2_C: D2.C R2.2 | length 5.7
  Top Layer w0.7: R2.2@5.48,9.27 R2.2
  Top Layer w1: D2.C 1.5,9.38 2.345,10.225 4.5,10.225 5.475,9.25 R2.2
NetGC2_1: GC2.1 U_GPS.3 | length 5.3
  Top Layer w0.7: GC2.1 21.5,10 22.5,9 U_GPS.3
NetGC2_2: GC2.2 U_MSP.25 | length 15.9
  Top Layer w0.7: GC2.2 21.5,15.222 24.553,18.275 U_MSP.25@33.16,18.275
NetGR1_1: GR1.1 U_GPS.14 | length 2.4
  Top Layer w0.7: U_GPS.14 39.25,10.5 40.725,10.5 GR1.1
NetGR1_2: GR1.2 P_GPS.1 U_MSP.30 | length 16
  Top Layer w0.3: U_MSP.30 35.75,17.6 36.25,17.1 39.4,17.1 41,15.5 GR1.2
  Top Layer w0.7: GR1.2 43.06,11.775 P_GPS.1
NetGR2_1: GR2.1 U_GPS.13 | length 2.2
  Top Layer w0.7: U_GPS.13 39.075,8.775 GR2.1
NetGR2_2: GR2.2 P_GPS.2 U_MSP.29 | length 36.8
  Top Layer w0.3: v2(26.45,16.45) 27.25,17.25 34.9,17.25 35.25,17.6 U_MSP.29 ; GR2.2 41,6 v1(41.5,5.5)
  Top Layer w0.7: v1(41.5,5.5) 44.205,5.5 P_GPS.2
  Bottom Layer w0.3: v2(26.45,16.45) 26.45,15.05 36,5.5 v1(41.5,5.5)
NetMC1_1: MC1.1 U_MAG.4 | length 2
  Top Layer w0.3: MC1.1 20.385,22.5 20.735,22.15 U_MAG.4
NetMR1_1: MR1.1 U_MAG.1 U_MSP.15 | length 11.7
  Top Layer w0.3: U_MAG.1 21.875,24.363 v2(23,25.488) ; v1(28.5,24.13) MR1.1 30.12,24.25 U_MSP.15
  Bottom Layer w0.3: v2(23,25.488) 24.012,25.488 25.37,24.13 v1(28.5,24.13)
NetMR2_2: MR2.2 U_MAG.11 U_MSP.14 | length 10
  Top Layer w0.3: U_MAG.11 22.888,24.038 23.3,24.45 26.175,24.45 MR2.2 30.195,25.275 30.72,24.75 U_MSP.14
NetP_Button_1: P_Button.1 R7.2 | length 2.8
  Top Layer w0.7: P_Button.1 25,29.66 R7.2
NetP_Button_2: P_Button.2 U_MSP.10 | length 8.5
  Top Layer w0.3: P_Button.2 30.95,30 32.815,28.135 33.615,28.135 34.25,27.5 U_MSP.10
NetP_EPAPER_1: P_EPAPER.1 U_MSP.47 | length 6.8
  Top Layer w0.3: U_MSP.47 41.79,24.75 44.205,27.165 P_EPAPER.1
NetP_EPAPER_2: P_EPAPER.2 U_MSP.46 | length 6.5
  Top Layer w0.3: U_MSP.46 42.878,24.25 44.523,25.895 P_EPAPER.2
NetP_EPAPER_3: P_EPAPER.3 U_MSP.45 | length 6.1
  Top Layer w0.3: U_MSP.45 43.85,23.75 44.725,24.625 P_EPAPER.3
NetP_EPAPER_4: P_EPAPER.4 U_MSP.44 | length 5.8
  Top Layer w0.3: U_MSP.44 45.895,23.25 P_EPAPER.4
NetP_EPAPER_5: P_EPAPER.5 U_MSP.43 | length 6.1
  Top Layer w0.3: U_MSP.43 43.813,22.75 44.478,22.085 P_EPAPER.5
NetP_EPAPER_6: P_EPAPER.6 U_MSP.42 | length 6.4
  Top Layer w0.3: U_MSP.42 43.485,22.25 44.92,20.815 P_EPAPER.6
NetP_EPAPER_7: P_EPAPER.7 U_MSP.41 | length 6.7
  Top Layer w0.3: U_MSP.41 42.295,21.75 44.5,19.545 P_EPAPER.7
NetP_EPAPER_8: P_EPAPER.8 U_MSP.40 | length 7
  Top Layer w0.3: U_MSP.40 41.75,21.25 44.725,18.275 P_EPAPER.8
NetP_EPAPER_9: P_EPAPER.9 U_MSP.39 | length 7.3
  Top Layer w0.3: U_MSP.39 41.175,20.75 44.92,17.005 P_EPAPER.9
NetP_EPAPER_10: P_EPAPER.10 U_MSP.37 | length 8.5
  Top Layer w0.3: U_MSP.37@40.7,19.75 U_MSP.37 41,18.975 v2(41,18)
  Bottom Layer w0.3: v2(41,18) 43.265,15.735 P_EPAPER.10
NetP_EPAPER_11: P_EPAPER.11 U_MSP.38 | length 8.6
  Top Layer w0.3: U_MSP.38 40.963,20.25 43.5,17.713 43.5,16.965 P_EPAPER.11
NetP_PROG_3: P_PROG.3 U_MSP.2 | length 7
  Top Layer w0.3: P_PROG.3 34.5,30.96 34.5,30.225 34.949,29.776 36.974,29.776 38.25,28.5 U_MSP.2
NetP_PROG_4: P_PROG.4 U_MSP.3 | length 7.7
  Top Layer w0.3: P_PROG.4 33.19,30.285 34.089,29.386 36.696,29.386 37.75,28.332 U_MSP.3
NetP_PROG_5: P_PROG.5 U_FTDI.2 U_MSP.4 | length 29.2
  Top Layer w0.3: U_FTDI.2 11.55,31.849 11.901,32.2 30.72,32.2 P_PROG.5 33.924,28.996 36.254,28.996 37.25,28 U_MSP.4
NetP_PROG_6: P_PROG.6 U_FTDI.15 U_MSP.5 | length 26.8
  Top Layer w0.3: U_FTDI.15 14.825,29.825 16.5,31.5 30.15,31.5 P_PROG.6 33.125,28.525 35.975,28.525 36.75,27.75 U_MSP.5
NetR1_1: R1.1 U_Charger.9 | length 8.8
  Top Layer w0.3: R1.1 7.05,6.081 9.631,3.5 10,3.5 10.485,3.985 10.485,5.515 10.15,5.85 U_Charger.9
NetR2_1: R2.1 U_Charger.7 | length 3.3
  Top Layer w0.3: 8.5,8 8.56,8 8.74,8.18 9.38,8.18 U_Charger.7
  Top Layer w0.7: R2.1 7.05,8.7 7.75,8 8.5,8
NetR3_2: R3.2 U_Charger.1 | length 4.6
  Top Layer w0.7: U_Charger.1@11.72,9.95 11.78,10.01 11.78,11.035 13.55,12.805 R3.2
NetR4_1: R4.1 U_Charger.16 | length 6
  Top Layer w0.3: U_Charger.16 12.35,9.38 12.63,9.66
  Top Layer w0.7: 12.63,9.66 16,13.03 R4.1
NetR5_1: R5.1 R6.2 U_MSP.12 | length 22.8
  Top Layer w0.7: R5.1 16.635,23.5 ; R6.2 16.635,23.5 ; 33.017,26.868 31.775,26.868 31.17,26.263 25.85,26.263 25.388,26.725 19.86,26.725 16.635,23.5
NetU_FTDI_6: U_FTDI.6 UR2.2 | length 4
  Top Layer w0.45: UR2.2 7.924,30.395 8.494,29.825 U_FTDI.6
NetU_FTDI_7: U_FTDI.7 UR1.2 | length 1.9
  Top Layer w0.45: UR1.2 7.98,28.845 8.31,29.175 U_FTDI.7
NetU_MAG_8: U_MAG.8 U_MSP.24 | length 9.6
  Top Layer w0.3: U_MAG.8 24.35,22.65 27.25,19.75 U_MSP.24
NetU_MAG_10: U_MAG.10 U_MSP.23 | length 9.8
  Top Layer w0.3: U_MAG.10 24.14,23.65 27.54,20.25 U_MSP.23
VBAT: CC2.2 P_Bat.1 U_Charger.2 U_Charger.3 | length 14.2
  Top Layer w0.4: U_Charger.3 10.63,9.97 10.63,10.505 10.62,10.515 10.62,11.4 10.769,11.549 10.93,11.387 11.08,11.237 U_Charger.2@11.08,9.95
  Top Layer w0.7: P_Bat.1 9.235,19 CC2.2 12,12.457 10.93,11.387
VCCIO: U_FTDI.1 U_FTDI.8 U_FTDI.9 UC4.1 | length 18.1
  Top Layer w0.3: U_FTDI.1 14.13,31.5 v1(14.63,31)
  Top Layer w0.5: U_FTDI.8 8.844,28.144 v1(8.844,26.725) 8.844,25.819 UC4.1 9.2,25.25 10.075,26.125 U_FTDI.9@10.075,27.675
  Bottom Layer w0.7: v1(8.844,26.725) 12.225,26.725 14.63,29.13 14.63,30.468
pads on no net: J_USB.None P_Bat.2 U_Charger.12 U_Charger.14 U_Charger.15 U_FTDI.4 U_FTDI.5 U_FTDI.11 U_FTDI.12 U_FTDI.14 U_FTDI.16 U_GPS.7 U_GPS.8 U_GPS.9 U_GPS.12 U_GPS.18 U_GPS.19 U_MAG.7 U_MSP.6 U_MSP.7 U_MSP.8 U_MSP.9 U_MSP.11 U_MSP.13 U_MSP.16 U_MSP.17 U_MSP.18 U_MSP.19 U_MSP.20 U_MSP.21 U_MSP.22 U_MSP.26 U_MSP.27 U_MSP.28 U_MSP.31 U_MSP.32 U_MSP.33 U_MSP.34 U_MSP.35 U_MSP.36

## Polygon pours and split planes (outlines as drawn)
GND on GND (split plane): 47.49,0.51 0.51,0.51 0.51,32.49 47.49,32.49
+5 on PWR (split plane): 17.349,0.51 0.51,0.51 0.51,32.49 17.349,32.49
3V3 on PWR (split plane): 47.49,0.51 17.651,0.51 17.651,32.49 47.49,32.49

## Keep-outs
Keep-Out Layer:
  the board outline again, w0.254

## Other copper
Top Layer:
  rectangle net GND: 9.131,9.17 10.25,10.225
  rectangle net GND: 4,15 5.174,16
  rectangle net VBAT: 10.435,9.525 11.225,11.237
  rectangle net NetCC3_1: 10.62,6.444 11.34,7.429
Bottom Layer:
PWR (plane layer: these items are gaps in the copper):
  lines w0.3: 17.5,-0.37 17.5,32.55

## Silkscreen, mask and mechanical layers (free items; w line width, h text height)
Bottom Overlay:
  drawing of 4 lines, arcs and shapes, not listed
  text "WatchDawg" at 30.97,4.5 h4

## Text inside footprints (layer, text, board x,y; h text height)
J_USB: Mechanical 4 "PCB EDGE" at 0.2,21.7 h0.9 r90; Mechanical 4 "PCB EDGE" at 0.2,21.7 h0.9 r90